# Altium PCB lesson.PcbDoc
Units mil, origin at the board's own origin, x right, y up, seen from the top; angles counter-clockwise.
Board outline 6000 x 4000 mil, 2 copper layers (Top Layer, Bottom Layer); 43 components, 0 nets, 425 pads, 0 vias.
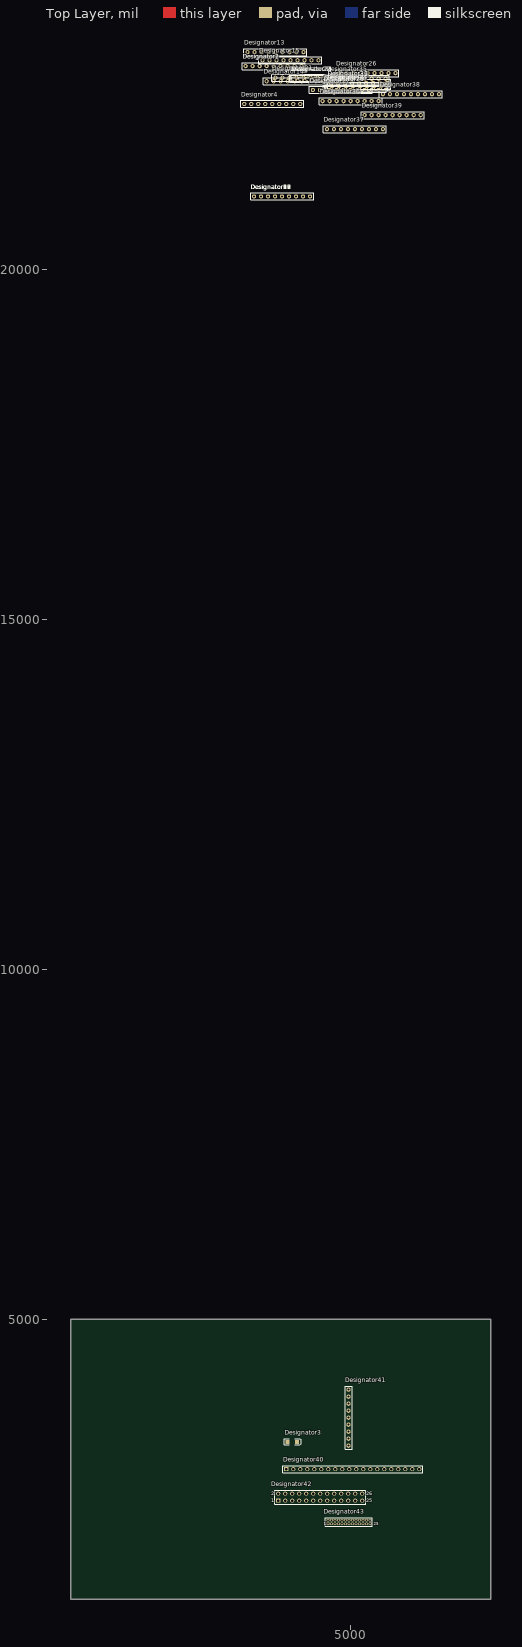
[diagram p0: Top Layer view]
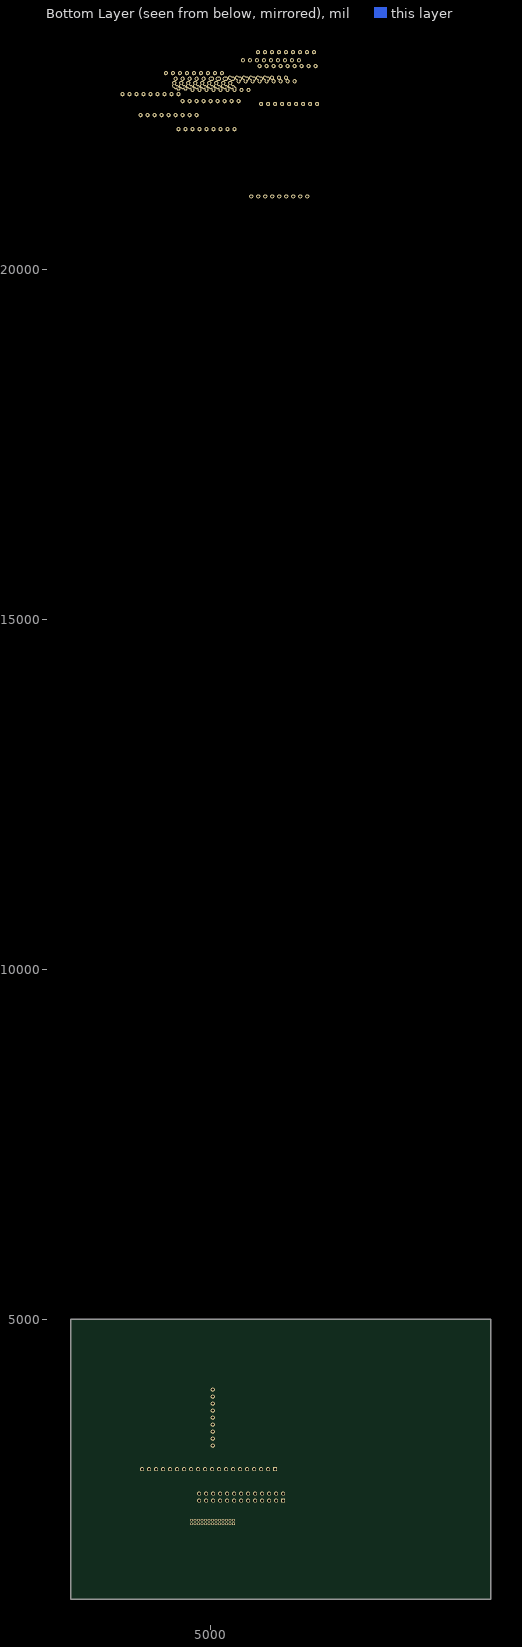
[diagram p1: Bottom Layer view, seen from below]

## Layer stack, top to bottom
Top Layer: signal copper 1.4
Dielectric: dielectric 12.6, FR-4, Dk 4.8
Bottom Layer: signal copper 1.4

## Board outline
1000,1000 7000,1000 7000,5000 1000,5000

## Design rules (kind name [scope] priority, off if disabled: settings)
Clearance [All] p1: gap=10
ComponentClearance [All] p1: gap=10 collisioncheckmode=3 verticalgap=10
PolygonConnect [All] p1: connectstyle=Relief reliefconductorwidth=10 reliefentries=4 polygonreliefangle="90 Angle"
RoutingVias [All] p1: holewidth=28 width=50 viastyle="Through Hole" minholewidth=28 minwidth=50 maxholewidth=28 maxwidth=50
SolderMaskExpansion [All] p1: expansion=4
TestPointUsage [All] p1: valid=0 allowmultiple=FALSE
Testpoint [All] p1: side=15 testpointundercomponent=TRUE minsize=40 maxsize=100 preferedsize=60 minholesize=0 maxholesize=40 preferedholesize=32 testpointgrid=1 style=1023 order=0123456789
Width [All] p1: maxlimit=10 minlimit=10 preferedwidth=10
18 further rules are at their usual default settings.

## Components (designator, comment, footprint, x,y, rotation, side; value= is the part's Value field where it differs from the comment)
Designator1 "Comment" shangla#1 3700,3700 r0 top
Designator2 "Comment" shangla#1 3700,3700 r0 top
Designator3 "Comment" 3.2X1.6X1.1 4165,3250 r0 top
Designator4 "Comment" shangla#1 3680,3160 r0 top
Designator5 "Comment" shangla#1 3820,1840 r0 top
Designator6 "Comment" shangla#1 3820,1840 r0 top
Designator7 "Comment" shangla#1 3820,1840 r0 top
Designator8 "Comment" shangla#1 3820,1840 r0 top
Designator9 "Comment" shangla#1 3820,1840 r0 top
Designator10 "Comment" shangla#1 3820,1840 r0 top
Designator11 "Comment" shangla#1 3820,1840 r0 top
Designator12 "Comment" shangla#1 3820,1840 r0 top
Designator13 "Comment" shangla#1 3725,3900 r0 top
Designator14 "Comment" shangla#1 4000,3485 r0 top
Designator15 "Comment" shangla#1 3940,3785 r0 top
Designator16 "Comment" shangla#1 3820,1840 r0 top
Designator17 "Comment" shangla#1 3820,1840 r0 top
Designator18 "Comment" shangla#1 3820,1840 r0 top
Designator19 "Comment" shangla#1 3820,1840 r0 top
Designator20 "Comment" shangla#1 3820,1840 r0 top
Designator21 "Comment" shangla#1 4125,3535 r0 top
Designator22 "Comment" shangla#1 4380,3520 r0 top
Designator23 "Comment" shangla#1 4400,3520 r0 top
Designator24 "Comment" shangla#1 4400,3520 r0 top
Designator25 "Comment" shangla#1 4400,3520 r0 top
Designator26 "Comment" shangla#1 5040,3600 r0 top
Designator27 "Comment" shangla#1 4660,3360 r0 top
Designator28 "Comment" shangla#1 4860,3380 r0 top
Designator29 "Comment" shangla#1 4860,3380 r0 top
Designator30 "Comment" shangla#1 4920,3460 r0 top
Designator31 "Comment" shangla#1 4920,3460 r0 top
Designator32 "Comment" shangla#1 4880,3400 r0 top
Designator33 "Comment" shangla#1 4920,3420 r0 top
Designator34 "Comment" shangla#1 4900,3400 r0 top
Designator35 "Comment" shangla#1 4900,3520 r0 top
Designator36 "Comment" shangla#1 4800,3200 r0 top
Designator37 "Comment" shangla#1 4860,2800 r0 top
Designator38 "Comment" shangla#1 5660,3300 r0 top
Designator39 "Comment" shangla#1 5400,3000 r0 top
Designator40 "Comment" HDR1X20 4080,2860 r0 top
Designator41 "Comment" shangla#2 4970,3995 r0 top
Designator42 "Comment" HDR2X13 3965,2410 r0 top
Designator43 "Comment" MHDR2X13 4675,2080 r0 top

## Footprints (in the part's own frame and the unit in brackets; to place one, negate y for a bottom-side part, rotate by r counter-clockwise, add the part's x,y. Pads: shape width x height; smd on the part's side, far side on the other; paste and mask are expansions set on the pad)
3.2X1.6X1.1 [mm] "SMT LED; 2 Flat Leads"
  rect 1.5x1.5 smd: 1(-1.75,0) 2(1.75,0)
  silkscreen extent -2.9,-1.15 3.2,1.15
HDR1X20 [mm] "Connector; Header; 20 Position"
  rect 1.5x1.5 hole 0.9: 1(0,0)
  round 1.5 hole 0.9: 2(2.54,0) 3(5.08,0) 4(7.62,0) 5(10.16,0) 6(12.7,0) 7(15.24,0) 8(17.78,0) 9(20.32,0) 10(22.86,0) 11(25.4,0) 12(27.94,0) 13(30.48,0) 14(33.02,0) 15(35.56,0) 16(38.1,0) 17(40.64,0) 18(43.18,0) 19(45.72,0) 20(48.26,0)
  silkscreen extent -1.27,-1.27 49.53,1.27
HDR2X13 [mm] "Connector; Header; 13x2 Position"
  rect 1.5x1.5 hole 0.9: 1(0,0)
  round 1.5 hole 0.9: 2(0,2.54) 3(2.54,0) 4(2.54,2.54) 5(5.08,0) 6(5.08,2.54) 7(7.62,0) 8(7.62,2.54) 9(10.16,0) 10(10.16,2.54) 11(12.7,0) 12(12.7,2.54) 13(15.24,0) 14(15.24,2.54) 15(17.78,0) 16(17.78,2.54) 17(20.32,0) 18(20.32,2.54) 19(22.86,0) 20(22.86,2.54) 21(25.4,0) 22(25.4,2.54) 23(27.94,0) 24(27.94,2.54) 25(30.48,0) 26(30.48,2.54)
  silkscreen extent -1.27,-1.27 31.75,3.81
MHDR2X13 [mm] "Connector; Header; 13x2 Position"
  rect 1x1 hole 0.6: 1(0,0)
  round 1 hole 0.6: 2(0,1.27) 3(1.27,0) 4(1.27,1.27) 5(2.54,0) 6(2.54,1.27) 7(3.81,0) 8(3.81,1.27) 9(5.08,0) 10(5.08,1.27) 11(6.35,0) 12(6.35,1.27) 13(7.62,0) 14(7.62,1.27) 15(8.89,0) 16(8.89,1.27) 17(10.16,0) 18(10.16,1.27) 19(11.43,0) 20(11.43,1.27) 21(12.7,0) 22(12.7,1.27) 23(13.97,0) 24(13.97,1.27) 25(15.24,0) 26(15.24,1.27)
  silkscreen extent -0.9,-0.9 16.14,2.17
shangla#1 [mil]
  round 60 hole 30: 1(-200,19200) 2(-100,19200) 3(0,19200) 4(100,19200) 5(200,19200) 6(300,19200) 7(400,19200) 8(500,19200) 9(600,19200)
  silkscreen extent -250,19150 650,19250
shangla#2 [mil]
  round 60 hole 30: 1(0,0) 2(0,-100) 3(0,-200) 4(0,-300) 5(0,-400) 6(0,-500) 7(0,-600) 8(0,-700) 9(0,-800)
  silkscreen extent -50,-850 50,50

## Nets (pads, with @x,y where several pads share a name; then routed paths per layer and width w, separated by ;. In a path a pad name is that pad's centre, name@x,y a point inside that pad or via, vN(x,y) a via of type N, cw(c..) or ccw(c..) an arc to the next point about the centre after c; other vN are vias at no path point)
pads on no net: Designator1.1 Designator1.2 Designator1.3 Designator1.4 Designator1.5 Designator1.6 Designator1.7 Designator1.8 Designator1.9 Designator2.1 Designator2.2 Designator2.3 Designator2.4 Designator2.5 Designator2.6 Designator2.7 Designator2.8 Designator2.9 Designator3.1 Designator3.2 Designator4.1 Designator4.2 Designator4.3 Designator4.4 Designator4.5 Designator4.6 Designator4.7 Designator4.8 Designator4.9 Designator5.1 Designator5.2 Designator5.3 Designator5.4 Designator5.5 Designator5.6 Designator5.7 Designator5.8 Designator5.9 Designator6.1 Designator6.2 Designator6.3 Designator6.4 Designator6.5 Designator6.6 Designator6.7 Designator6.8 Designator6.9 Designator7.1 Designator7.2 Designator7.3 Designator7.4 Designator7.5 Designator7.6 Designator7.7 Designator7.8 Designator7.9 Designator8.1 Designator8.2 Designator8.3 Designator8.4 Designator8.5 Designator8.6 Designator8.7 Designator8.8 Designator8.9 Designator9.1 Designator9.2 Designator9.3 Designator9.4 Designator9.5 Designator9.6 Designator9.7 Designator9.8 Designator9.9 Designator10.1 Designator10.2 Designator10.3 Designator10.4 Designator10.5 Designator10.6 Designator10.7 Designator10.8 Designator10.9 Designator11.1 Designator11.2 Designator11.3 Designator11.4 Designator11.5 Designator11.6 Designator11.7 Designator11.8 Designator11.9 Designator12.1 Designator12.2 Designator12.3 Designator12.4 Designator12.5 Designator12.6 Designator12.7 Designator12.8 Designator12.9 Designator13.1 Designator13.2 Designator13.3 Designator13.4 Designator13.5 Designator13.6 Designator13.7 Designator13.8 Designator13.9 Designator14.1 Designator14.2 Designator14.3 Designator14.4 Designator14.5 Designator14.6 Designator14.7 Designator14.8 Designator14.9 Designator15.1 Designator15.2 Designator15.3 Designator15.4 Designator15.5 Designator15.6 Designator15.7 Designator15.8 Designator15.9 Designator16.1 Designator16.2 Designator16.3 Designator16.4 Designator16.5 Designator16.6 Designator16.7 Designator16.8 Designator16.9 Designator17.1 Designator17.2 Designator17.3 Designator17.4 Designator17.5 Designator17.6 Designator17.7 Designator17.8 Designator17.9 Designator18.1 Designator18.2 Designator18.3 Designator18.4 Designator18.5 Designator18.6 Designator18.7 Designator18.8 Designator18.9 Designator19.1 Designator19.2 Designator19.3 Designator19.4 Designator19.5 Designator19.6 Designator19.7 Designator19.8 Designator19.9 Designator20.1 Designator20.2 Designator20.3 Designator20.4 Designator20.5 Designator20.6 Designator20.7 Designator20.8 Designator20.9 Designator21.1 Designator21.2 Designator21.3 Designator21.4 Designator21.5 Designator21.6 Designator21.7 Designator21.8 Designator21.9 Designator22.1 Designator22.2 Designator22.3 Designator22.4 Designator22.5 Designator22.6 Designator22.7 Designator22.8 Designator22.9 Designator23.1 Designator23.2 Designator23.3 Designator23.4 Designator23.5 Designator23.6 Designator23.7 Designator23.8 Designator23.9 Designator24.1 Designator24.2 Designator24.3 Designator24.4 Designator24.5 Designator24.6 Designator24.7 Designator24.8 Designator24.9 Designator25.1 Designator25.2 Designator25.3 Designator25.4 Designator25.5 Designator25.6 Designator25.7 Designator25.8 Designator25.9 Designator26.1 Designator26.2 Designator26.3 Designator26.4 Designator26.5 Designator26.6 Designator26.7 Designator26.8 Designator26.9 Designator27.1 Designator27.2 Designator27.3 Designator27.4 Designator27.5 Designator27.6 Designator27.7 Designator27.8 Designator27.9 Designator28.1 Designator28.2 Designator28.3 Designator28.4 Designator28.5 Designator28.6 Designator28.7 Designator28.8 Designator28.9 Designator29.1 Designator29.2 Designator29.3 Designator29.4 Designator29.5 Designator29.6 Designator29.7 Designator29.8 Designator29.9 Designator30.1 Designator30.2 Designator30.3 Designator30.4 Designator30.5 Designator30.6 Designator30.7 Designator30.8 Designator30.9 Designator31.1 Designator31.2 Designator31.3 Designator31.4 Designator31.5 Designator31.6 Designator31.7 Designator31.8 Designator31.9 Designator32.1 Designator32.2 Designator32.3 Designator32.4 Designator32.5 Designator32.6 Designator32.7 Designator32.8 Designator32.9 Designator33.1 Designator33.2 Designator33.3 Designator33.4 Designator33.5 Designator33.6 Designator33.7 Designator33.8 Designator33.9 Designator34.1 Designator34.2 Designator34.3 Designator34.4 Designator34.5 Designator34.6 Designator34.7 Designator34.8 Designator34.9 Designator35.1 Designator35.2 Designator35.3 Designator35.4 Designator35.5 Designator35.6 Designator35.7 Designator35.8 Designator35.9 Designator36.1 Designator36.2 Designator36.3 Designator36.4 Designator36.5 Designator36.6 Designator36.7 Designator36.8 Designator36.9 Designator37.1 Designator37.2 Designator37.3 Designator37.4 Designator37.5 Designator37.6 Designator37.7 Designator37.8 Designator37.9 Designator38.1 Designator38.2 Designator38.3 Designator38.4 Designator38.5 Designator38.6 Designator38.7 Designator38.8 Designator38.9 Designator39.1 Designator39.2 Designator39.3 Designator39.4 Designator39.5 Designator39.6 Designator39.7 Designator39.8 Designator39.9 Designator40.1 Designator40.2 Designator40.3 Designator40.4 Designator40.5 Designator40.6 Designator40.7 Designator40.8 Designator40.9 Designator40.10 Designator40.11 Designator40.12 Designator40.13 Designator40.14 Designator40.15 Designator40.16 Designator40.17 Designator40.18 Designator40.19 Designator40.20 Designator41.1 Designator41.2 Designator41.3 Designator41.4 Designator41.5 Designator41.6 Designator41.7 Designator41.8 Designator41.9 Designator42.1 Designator42.2 Designator42.3 Designator42.4 Designator42.5 Designator42.6 Designator42.7 Designator42.8 Designator42.9 Designator42.10 Designator42.11 Designator42.12 Designator42.13 Designator42.14 Designator42.15 Designator42.16 Designator42.17 Designator42.18 Designator42.19 Designator42.20 Designator42.21 Designator42.22 Designator42.23 Designator42.24 Designator42.25 Designator42.26 Designator43.1 Designator43.2 Designator43.3 Designator43.4 Designator43.5 Designator43.6 Designator43.7 Designator43.8 Designator43.9 Designator43.10 Designator43.11 Designator43.12 Designator43.13 Designator43.14 Designator43.15 Designator43.16 Designator43.17 Designator43.18 Designator43.19 Designator43.20 Designator43.21 Designator43.22 Designator43.23 Designator43.24 Designator43.25 Designator43.26

## Text inside footprints (layer, text, board x,y; h text height)
Designator42: Top Overlay "26" at 5225,2490 h50; Top Overlay "25" at 5225,2390 h50; Top Overlay "1" at 3865,2390 h50; Top Overlay "2" at 3865,2490 h50
Designator43: Top Overlay "1" at 4612.01,2060 h39.37; Top Overlay "25" at 5328.54,2060 h39.37